# EAGLE board Cooling rev2 - thruhole (EAGLE 7.2.0)
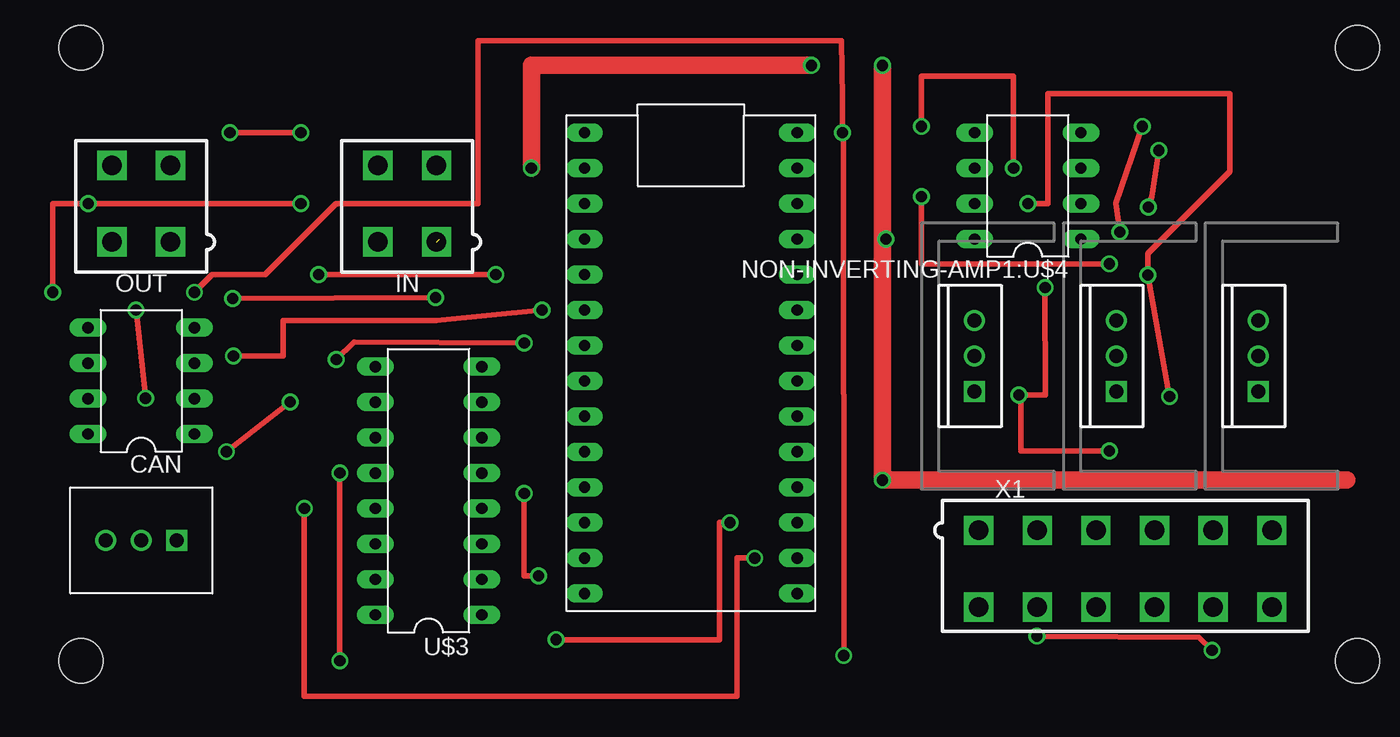
[diagram p0: board, top side]
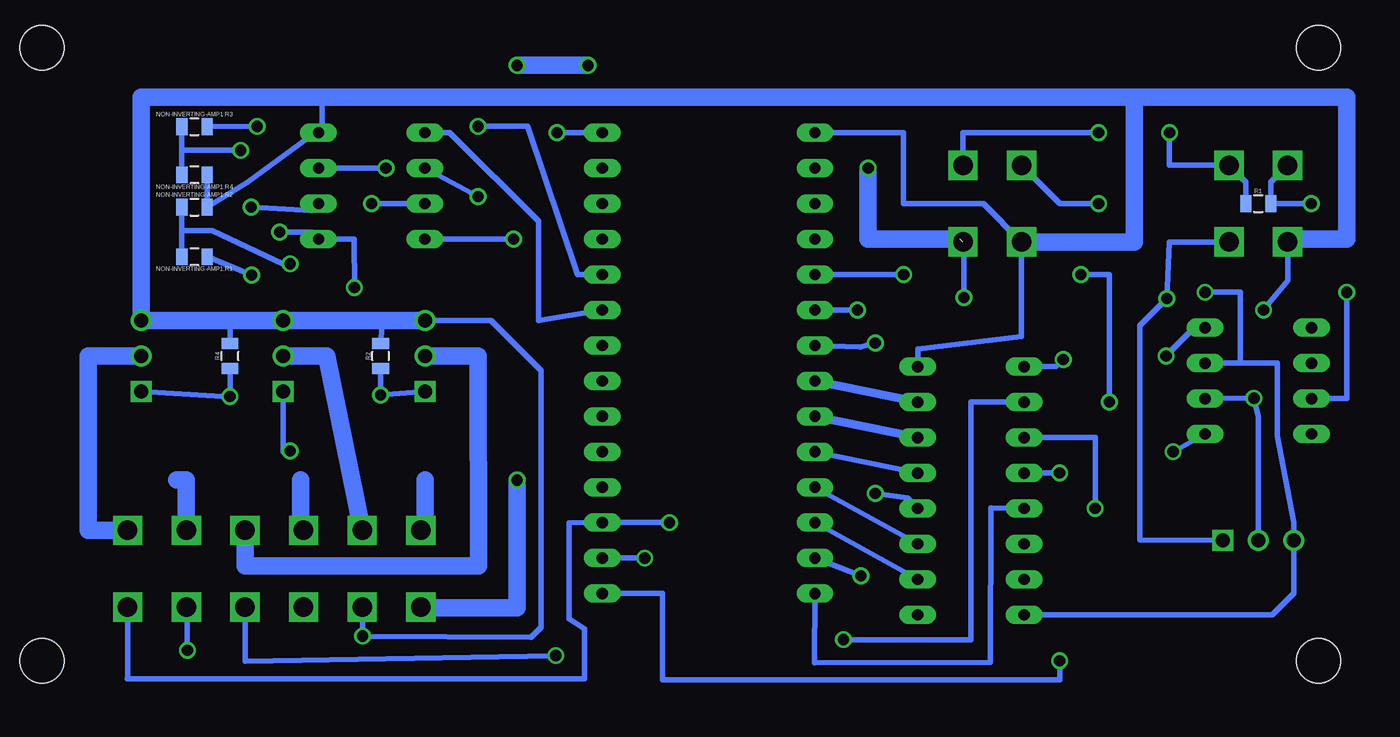
[diagram p1: board, bottom side, seen from below]

No outline drawn. Coordinates in mm, seen from the top.
Copper layers (1*16): Top 0.035mm / dielectric 1.5mm / Bottom 0.035mm
Design rules "default *": minimum track width 10mil, minimum drill 20mil, track to track 33mil, track to pad 33mil, pad to pad 33mil, via to via 33mil, smd to smd 33mil, copper to edge 40mil, drill to drill 8mil, minimum pad ring 10mil, minimum via ring 8mil, stop-mask expansion 4mil, vias tented up to drill 0mil, thermal gap 10mil
Net classes: 0 default: width 0.406 mm, drill 0.762 mm, clearance 0.813 mm
Holes 3.17 mm at 3.81,3.81 3.81,47.75 95.25,47.75 95.25,3.81

## Footprints (pad centres in the part's own frame; a part is rotated, then mirrored left to right if it is on the bottom)
DIL08 = drill 0.813 long: 1 -3.81,-3.81; 2 -1.27,-3.81; 3 1.27,-3.81; 4 3.81,-3.81; 5 3.81,3.81; 6 1.27,3.81; 7 -1.27,3.81; 8 -3.81,3.81
TO-220-SPACED = drill 1 square: 1 -2.54,0 | drill 1: 2 0,0; 3 2.54,0
MINIFIT_5566-4 = drill 1.4 square: 1 2.1,-2.75; 2 -2.1,-2.75; 3 2.1,2.75; 4 -2.1,2.75
0805 = smd 0.8 x 1.2: 1 -0.9,0; 2 0.9,0
TO-220-SINK-SPACED = drill 1 square: 1 -2.54,0 | drill 1: 2 0,0; 3 2.54,0
TEENSY_3.2_SIMPLE = drill 0.8 long: 3.3V 16.51,29.21; A0 16.51,3.81; A1 16.51,6.35; A2 16.51,8.89; A3 16.51,11.43; A4 16.51,13.97; A5 16.51,16.51; A6 16.51,19.05; A7 16.51,21.59; A8 16.51,24.13; A9 16.51,26.67; AGND 16.51,31.75; D0(RX1) 1.27,31.75; D1(TX1) 1.27,29.21; D2 1.27,26.67; D3(CANTX) 1.27,24.13; D4(CANRX) 1.27,21.59; D5 1.27,19.05; D6 1.27,16.51; D7(RX3) 1.27,13.97; D8(TX3) 1.27,11.43; D9(RX2) 1.27,8.89; D10(TX2) 1.27,6.35; D11 1.27,3.81; D12 1.27,1.27; D13 16.51,1.27; GND 1.27,34.29; VIN 16.51,34.29
DIL16 = drill 0.813 long: 1 -8.89,-3.81; 2 -6.35,-3.81; 3 -3.81,-3.81; 4 -1.27,-3.81; 5 1.27,-3.81; 6 3.81,-3.81; 7 6.35,-3.81; 8 8.89,-3.81; 9 8.89,3.81; 10 6.35,3.81; 11 3.81,3.81; 12 1.27,3.81; 13 -1.27,3.81; 14 -3.81,3.81; 15 -6.35,3.81; 16 -8.89,3.81
MINIFIT_5566-12 = drill 1.4 square: 1 10.5,-2.75; 2 6.3,-2.75; 3 2.1,-2.75; 4 -2.1,-2.75; 5 -6.3,-2.75; 6 -10.5,-2.75; 7 10.5,2.75; 8 6.3,2.75; 9 2.1,2.75; 10 -2.1,2.75; 11 -6.3,2.75; 12 -10.5,2.75

## Placement (x,y rotation side)
CAN  MCP2551DIL  [DIL08]  8.13,23.88 90 top
IC1  [TO-220-SPACED]  8.13,12.45 180 top
IN  [MINIFIT_5566-4]  27.18,36.58 0 top
NON-INVERTING-AMP1:R1  [0805]  84.33,32.77 180 bottom
NON-INVERTING-AMP1:R2  [0805]  84.33,36.32 0 bottom
NON-INVERTING-AMP1:R3  [0805]  84.33,42.09 0 bottom
NON-INVERTING-AMP1:R4  [0805]  84.33,38.63 180 bottom
NON-INVERTING-AMP1:U$4  MCP6002PDIP  [DIL08]  71.63,37.85 90 top
OUT  [MINIFIT_5566-4]  8.13,36.58 0 top
R1  120  [0805]  8.13,36.58 0 bottom
R2  [0805]  70.99,25.65 90 bottom
R4  [0805]  81.79,25.65 90 bottom
T1  N-CHANNEL_MOSFETGENERIC_SPACED  [TO-220-SINK-SPACED]  77.98,25.65 90 top
T2  N-CHANNEL_MOSFETGENERIC_SPACED  [TO-220-SINK-SPACED]  67.82,25.65 90 top
T3  N-CHANNEL_MOSFETGENERIC_SPACED  [TO-220-SINK-SPACED]  88.14,25.65 90 top
U$1  TEENSY_3.2_SIMPLE  [TEENSY_3.2_SIMPLE]  38.61,7.37 0 top
U$3  CD4040B  [DIL16]  28.7,16 90 top
X1  MINIFIT_5566-12  [MINIFIT_5566-12]  78.61,10.41 180 top

## Library data of the parts
CAN IC1 NON-INVERTING-AMP1:R1-NON-INVERTING-AMP1:R4 NON-INVERTING-AMP1:U$4 R1 R2 R4 T1-T3 U$1 U$3 = HyTechDevices
IN OUT X1 = HyTechDevices; OC_FARNELL: unknown; OC_NEWARK: unknown

## Nets
+5V: CAN.3 IC1.3 U$1.VIN U$3.16 X1.10
+12V: IC1.1 IN.1 NON-INVERTING-AMP1:U$4.8 OUT.1 X1.1 X1.3 X1.5 X1.7
FAN1-: T1.2 X1.2
FAN2-: T2.2 X1.4
FAN3-: T3.2 X1.6
GND: CAN.2 IC1.2 IN.2 NON-INVERTING-AMP1:R2.2 NON-INVERTING-AMP1:R4.1 NON-INVERTING-AMP1:U$4.4 OUT.2 R2.2 R4.2 T1.3 T2.3 T3.3 U$1.GND U$3.8 X1.8 X1.11
N$1: NON-INVERTING-AMP1:R3.2 NON-INVERTING-AMP1:U$4.1 R2.1 T1.1 T2.1
N$2: CAN.1 U$1.D3(CANTX)
N$3: CAN.4 U$1.D4(CANRX)
N$4: NON-INVERTING-AMP1:U$4.3 U$1.A8
N$5: CAN.6
N$6: NON-INVERTING-AMP1:R1.1 NON-INVERTING-AMP1:U$4.7 R4.1 T3.1
N$8: IN.3 OUT.3 R1.1
N$11: CAN.7 IN.4 OUT.4 R1.2
N$12: U$1.D5 U$3.9
N$13: U$1.D6 U$3.7
N$14: U$1.D7(RX3) U$3.6
N$15: U$1.D8(TX3) U$3.5
N$16: U$1.D9(RX2) U$3.3
N$17: U$1.D10(TX2) U$3.2
N$20: NON-INVERTING-AMP1:U$4.5 U$1.A7
N$21: U$1.D11 U$3.4
N$22: U$1.D12 U$3.13
N$23: U$1.A0 U$3.11
N$24: U$1.D13 U$3.12
NON-INVERTING-AMP1:N$2: NON-INVERTING-AMP1:R1.2 NON-INVERTING-AMP1:R2.1 NON-INVERTING-AMP1:U$4.6
NON-INVERTING-AMP1:N$4: NON-INVERTING-AMP1:R3.1 NON-INVERTING-AMP1:R4.2 NON-INVERTING-AMP1:U$4.2
PULSE: U$1.A1 U$3.10 X1.12

## Tracks (layer width: path | path; a pad name or v marks a point on that pad's centre or on a via)
+5V  (via drill 0.8)
  Top 0.406: v11.94,30.23 13.21,31.5 17.02,31.5 22.1,36.58 32.26,36.58 32.26,48.26 58.29,48.26 58.34,44.15 v58.34,41.66 58.42,41.66 v58.45,4.19
  Bottom 0.406: v11.94,30.23 9.4,30.23 9.4,25.15 CAN.3 6.76,25.17 6.76,19.94 5.59,13.72 IC1.3 5.59,8.64 7.11,7.11 U$3.16 | v58.34,41.66 U$1.VIN | v58.45,4.19 80.69,3.79 X1.10
+12V  (via drill 0.8)  (1 unrouted)
  Top 0.406: v29.21,29.84 v14.68,29.77
  Top 1.27: 94.49,16.76 85.6,16.76 76.71,16.76 67.82,16.76 v61.21,16.76 61.21,33.78 v61.47,34.04 61.21,34.04 v61.21,46.48 | v36.07,39.12 36.07,46.48 v56.13,46.48
  Bottom 0.406: IC1.1 16.61,12.47 16.61,27.84 v14.68,29.77 14.48,33.83 OUT.1 | IN.1 29.21,33.57 v29.21,29.84 | v61.47,34.04 NON-INVERTING-AMP1:U$4.8
  Bottom 1.27: X1.1 67.82,13.16 67.82,16.76 | 67.82,7.66 X1.7 68.11,7.62 61.21,7.62 v61.21,16.76 | 85.6,16.76 84.91,16.76 X1.5 | X1.3 76.71,13.16 76.71,16.76 | 29.49,34.04 36.07,34.04 v36.07,39.12 | v56.13,46.48 v61.21,46.48
FAN1-
  Bottom 1.27: T1.2 74.85,25.65 X1.2
FAN2-
  Bottom 1.27: T2.2 64.01,25.65 63.98,10.62 80.69,10.62 X1.4
FAN3-
  Bottom 1.27: X1.6 91.95,13.16 91.95,25.65 T3.2
GND  (via drill 0.8)
  Top 0.406: v7.75,28.96 v8.43,22.63 | v72.29,5.59 83.9,5.51 v84.84,4.57
  Bottom 0.406: U$3.8 32.51,26.16 25.08,27.05 IN.2 27.83,36.58 33.53,36.58 33.53,41.66 U$1.GND | IC1.2 8.13,21.34 v8.43,22.63 CAN.2 | OUT.2 6.03,31.06 v7.75,28.96 | R4.2 81.79,28.19 | 75.18,44.2 75.18,41.66 NON-INVERTING-AMP1:U$4.4 75.69,41.66 80.52,38.1 NON-INVERTING-AMP1:R2.2 NON-INVERTING-AMP1:R4.1 | R2.2 70.87,28.19 | T2.3 63.09,28.19 59.51,24.61 59.51,6.22 60.22,5.51 v72.29,5.59 X1.8 | v84.84,4.57 84.84,7.59 X1.11
  Bottom 0.61: IN.2 25.08,33.6
  Bottom 1.27: T2.3 70.87,28.19 T1.3 81.79,28.19 T3.3 88.14,44.2 75.18,44.2 17.02,44.2 | OUT.2 5.82,34.04 1.78,34.04 1.78,44.2 17.02,44.2 | IN.2 17.02,33.83 17.02,44.2
N$1  (via drill 0.8)
  Top 0.406: v77.47,18.85 71.12,18.85 71.12,22.86 v70.99,22.86 | 70.94,22.73 v70.99,22.86 | v72.87,30.56 72.9,22.86 v70.99,22.86 | v79.83,42.11 77.95,36.63 v78.23,34.54
  Bottom 0.406: T2.1 v70.99,22.86 R2.1 70.99,22.73 71.12,22.61 | T1.1 77.98,18.8 v77.47,18.85 | v72.87,30.56 72.9,34.04 NON-INVERTING-AMP1:U$4.1 75.95,34.54 v78.23,34.54 | NON-INVERTING-AMP1:R3.2 v79.83,42.11
N$2  (via drill 0.8)
  Top 0.406: v14.22,18.8 v18.8,22.35 | v20.83,31.5 v33.53,31.5
  Bottom 0.406: CAN.1 v14.22,18.8 | v33.53,31.5 U$1.D3(CANTX) | v18.8,22.35 18.8,31.5 v20.83,31.5
N$3  (via drill 0.8)
  Top 0.406: v36.83,28.96 29.26,28.19 18.29,28.19 18.29,25.65 v14.73,25.65
  Bottom 0.406: CAN.4 12.7,27.69 v14.73,25.65 | v36.83,28.96 U$1.D4(CANRX)
N$4  (via drill 0.8)
  Top 0.406: v64.01,42.11 64.01,45.72 70.61,45.72 v70.61,39.12
  Bottom 0.406: U$1.A8 56.9,31.5 60.45,42.11 v64.01,42.11 | v70.61,39.12 NON-INVERTING-AMP1:U$4.3
N$6  (via drill 0.8)
  Top 0.406: v81.79,22.76 v80.24,31.45 80.24,32.99 86.11,38.86 86.11,44.45 73.08,44.45 73.08,36.58 v71.63,36.58
  Bottom 0.406: T3.1 82.3,22.76 v81.79,22.76 R4.1 | NON-INVERTING-AMP1:R1.1 v80.24,31.45 | v71.63,36.58 NON-INVERTING-AMP1:U$4.7
N$8  (via drill 0.8)
  Top 0.406: v19.56,41.66 v14.48,41.66
  Bottom 0.406: R1.1 9.03,38.13 OUT.3 14.48,39.33 v14.48,41.66 | IN.3 29.28,41.66 v19.56,41.66
N$11  (via drill 0.8)
  Top 0.406: v1.78,30.23 1.78,36.58 v4.32,36.58 v19.56,36.58
  Bottom 0.406: CAN.7 1.78,22.61 v1.78,30.23 | v4.32,36.58 R1.2 7.23,38.13 OUT.4 | IN.4 22.33,36.58 v19.56,36.58
N$12  (via drill 0.8)
  Top 0.406: v35.56,26.59 23.37,26.67 v22.1,25.4
  Bottom 0.406: U$1.D5 36.63,26.31 v35.56,26.59 | v22.1,25.4 22.61,24.89 U$3.9
N$13
  Bottom 0.61: U$1.D6 U$3.7
N$14
  Bottom 0.61: U$1.D7(RX3) U$3.6
N$15
  Bottom 0.406: U$1.D8(TX3) U$3.5
N$16
  Bottom 0.406: U$1.D9(RX2) U$3.3
N$17
  Bottom 0.406: U$1.D10(TX2) U$3.2
N$20
  Bottom 0.406: U$1.A7 59.69,28.19 59.69,35.31 66.04,41.66 NON-INVERTING-AMP1:U$4.5
N$21  (via drill 0.8)
  Top 0.406: v36.58,9.91 35.56,9.91 v35.56,15.8
  Bottom 0.406: U$1.D11 v36.58,9.91 | v35.56,15.8 33.27,15.49 U$3.4
N$22
  Bottom 0.406: U$3.13 27.28,14.76 27.3,3.71 39.9,3.68 U$1.D12
N$23  (via drill 0.8)
  Top 0.406: v19.81,14.73 19.81,1.27 50.8,1.27 50.8,11.18 v52.07,11.18
  Bottom 0.406: U$3.11 19.81,19.81 v19.81,14.73 | v52.07,11.18 U$1.A0
N$24  (via drill 0.8)
  Top 0.406: v22.35,3.81 v22.35,17.27
  Bottom 0.406: U$1.D13 50.8,8.64 50.8,2.44 22.35,2.44 v22.35,3.81 | v22.35,17.27 U$3.12
NON-INVERTING-AMP1:N$2  (via drill 0.8)
  Top 0.406: v64.01,37.08 64.01,32.26 v77.47,32.26
  Bottom 0.406: NON-INVERTING-AMP1:R2.1 85.23,34.65 | 85.23,34.65 NON-INVERTING-AMP1:R1.2 | NON-INVERTING-AMP1:U$4.6 v64.01,37.08 | v77.47,32.26 77.98,32.26 83.06,34.65 85.23,34.65
NON-INVERTING-AMP1:N$4  (via drill 0.8)
  Top 0.406: v80.26,36.32 80.52,37.08 v81.03,40.39
  Bottom 0.406: NON-INVERTING-AMP1:U$4.2 75.95,36.07 v80.26,36.32 | v81.03,40.39 81.1,40.41 85.14,40.41 85.23,40.3 | NON-INVERTING-AMP1:R4.2 85.23,40.3 | 85.23,40.3 NON-INVERTING-AMP1:R3.1
PULSE  (via drill 0.8)
  Top 0.406: v37.85,5.33 49.53,5.33 49.53,13.72 v50.29,13.72
  Bottom 0.406: U$3.10 28.7,22.35 28.7,5.33 v37.85,5.33 | v50.29,13.72 U$1.A1 57.48,13.69 57.48,6.83 56.39,6.1 56.39,2.54 89.15,2.54 89.11,2.58 X1.12